# Altium PCB AICat V1.7 双面板 板厚1.6mm.PcbDoc (part 1 of 6)
Units mil, origin at the board's own origin, x right, y up, seen from the top; angles counter-clockwise.
Board outline 2778 x 2104 mil, 2 copper layers (Top Layer, Bottom Layer); 123 components, 84 nets, 332 pads, 255 vias.
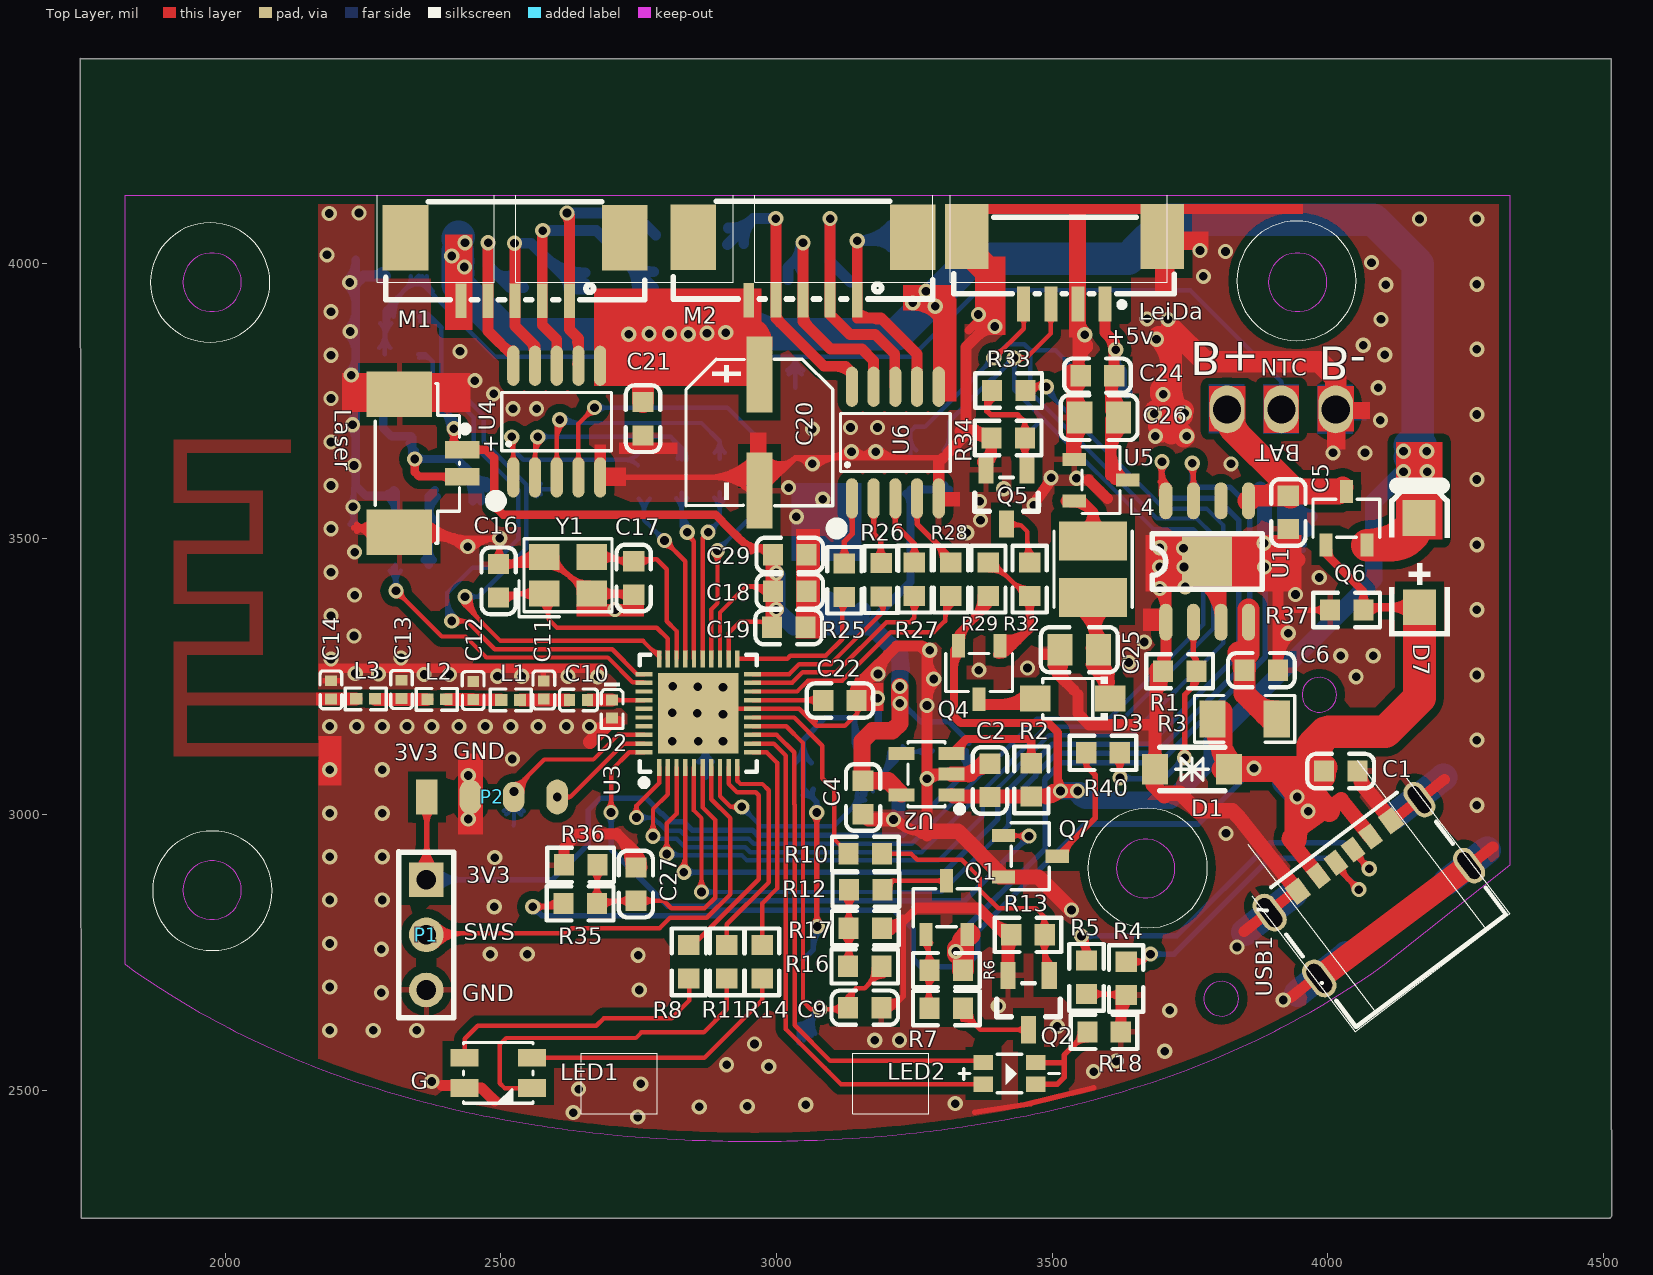
[diagram p0: Top Layer view]
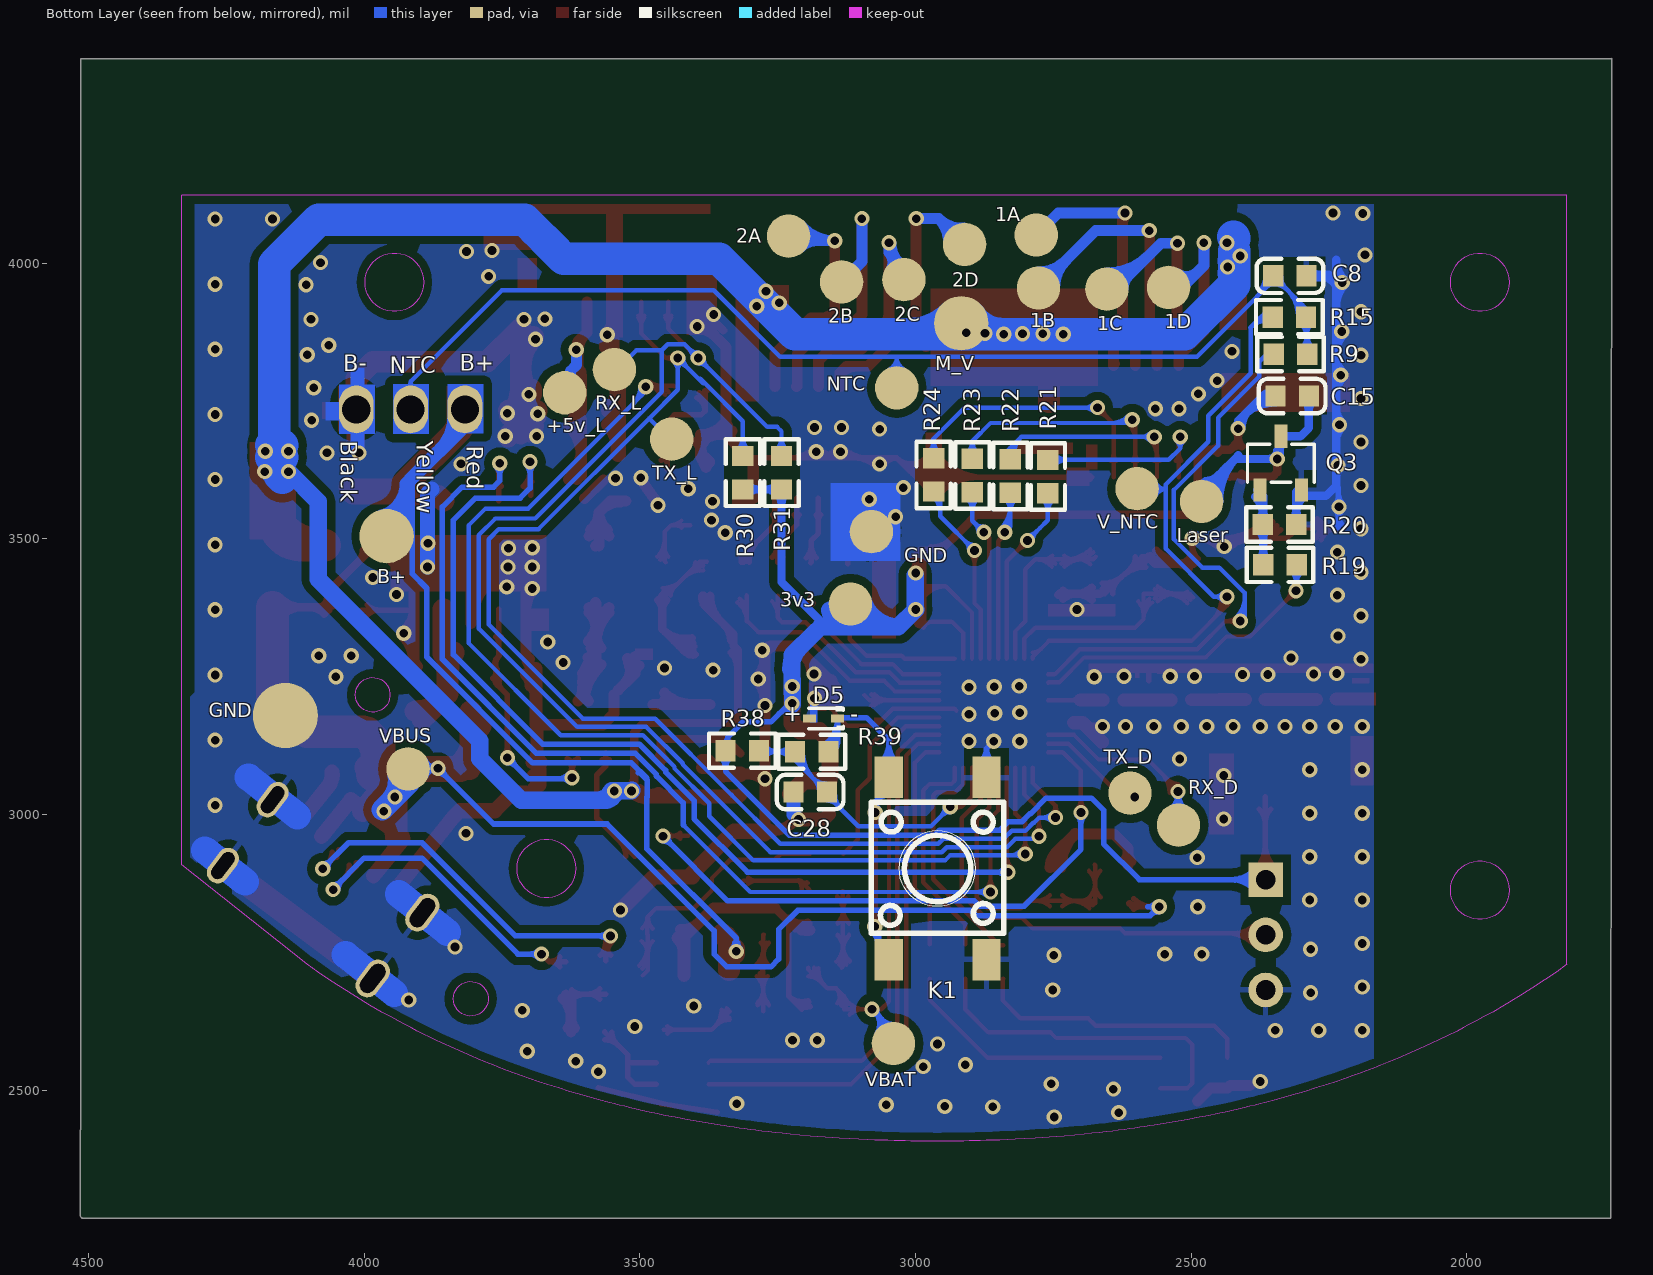
[diagram p1: Bottom Layer view, seen from below]
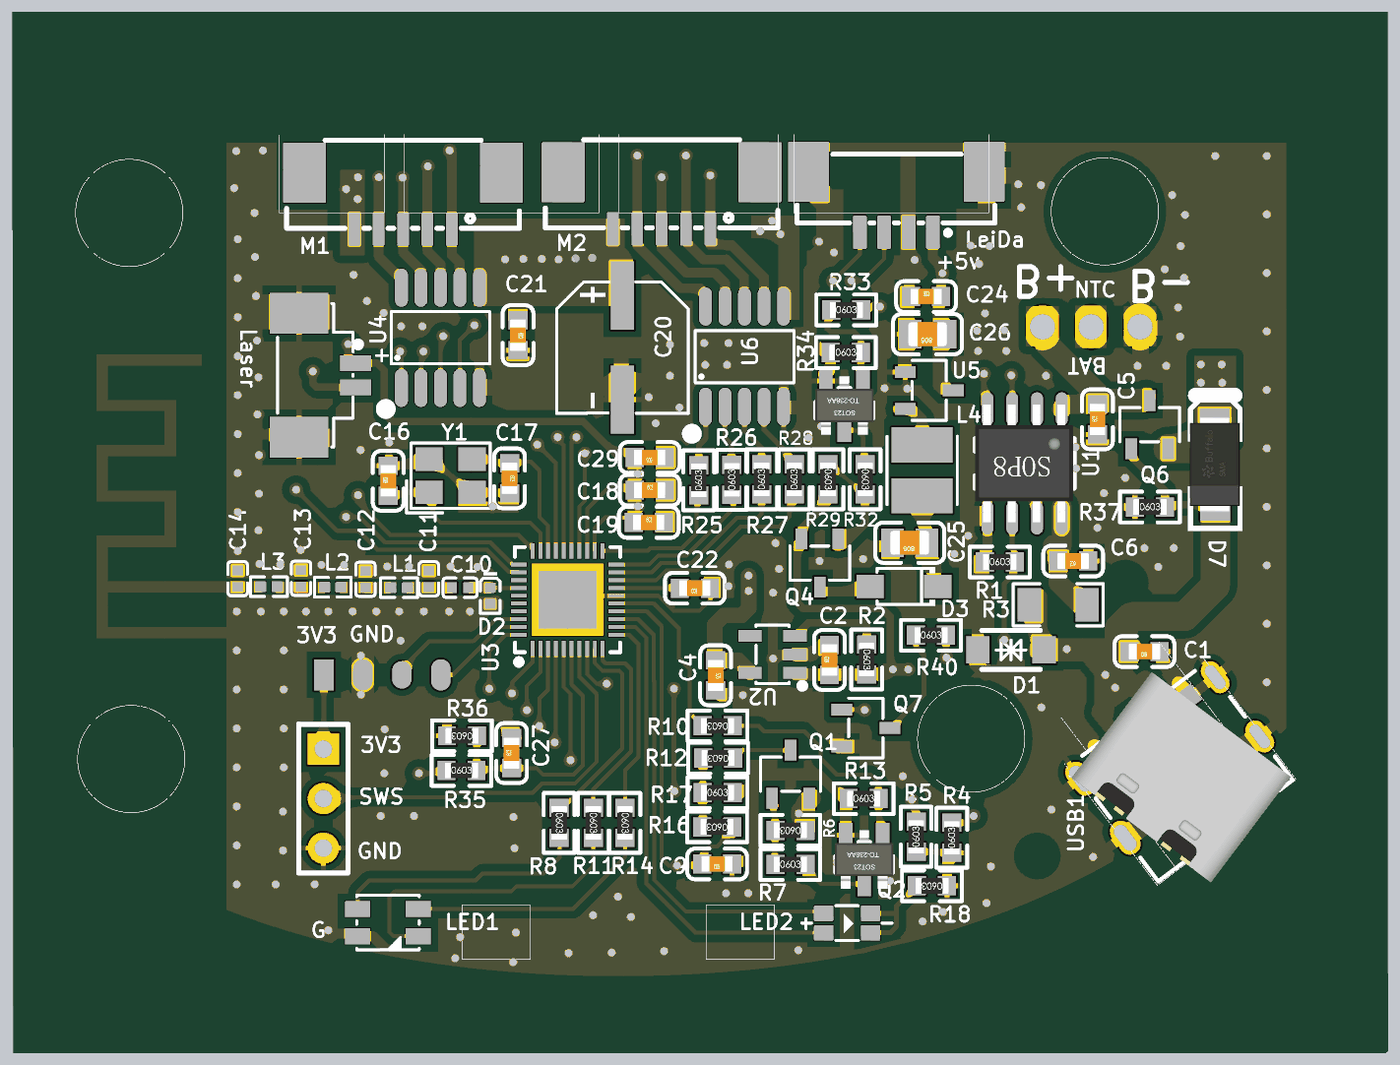
[diagram p7: 3D render of the assembled board from above, using the file's embedded part models]
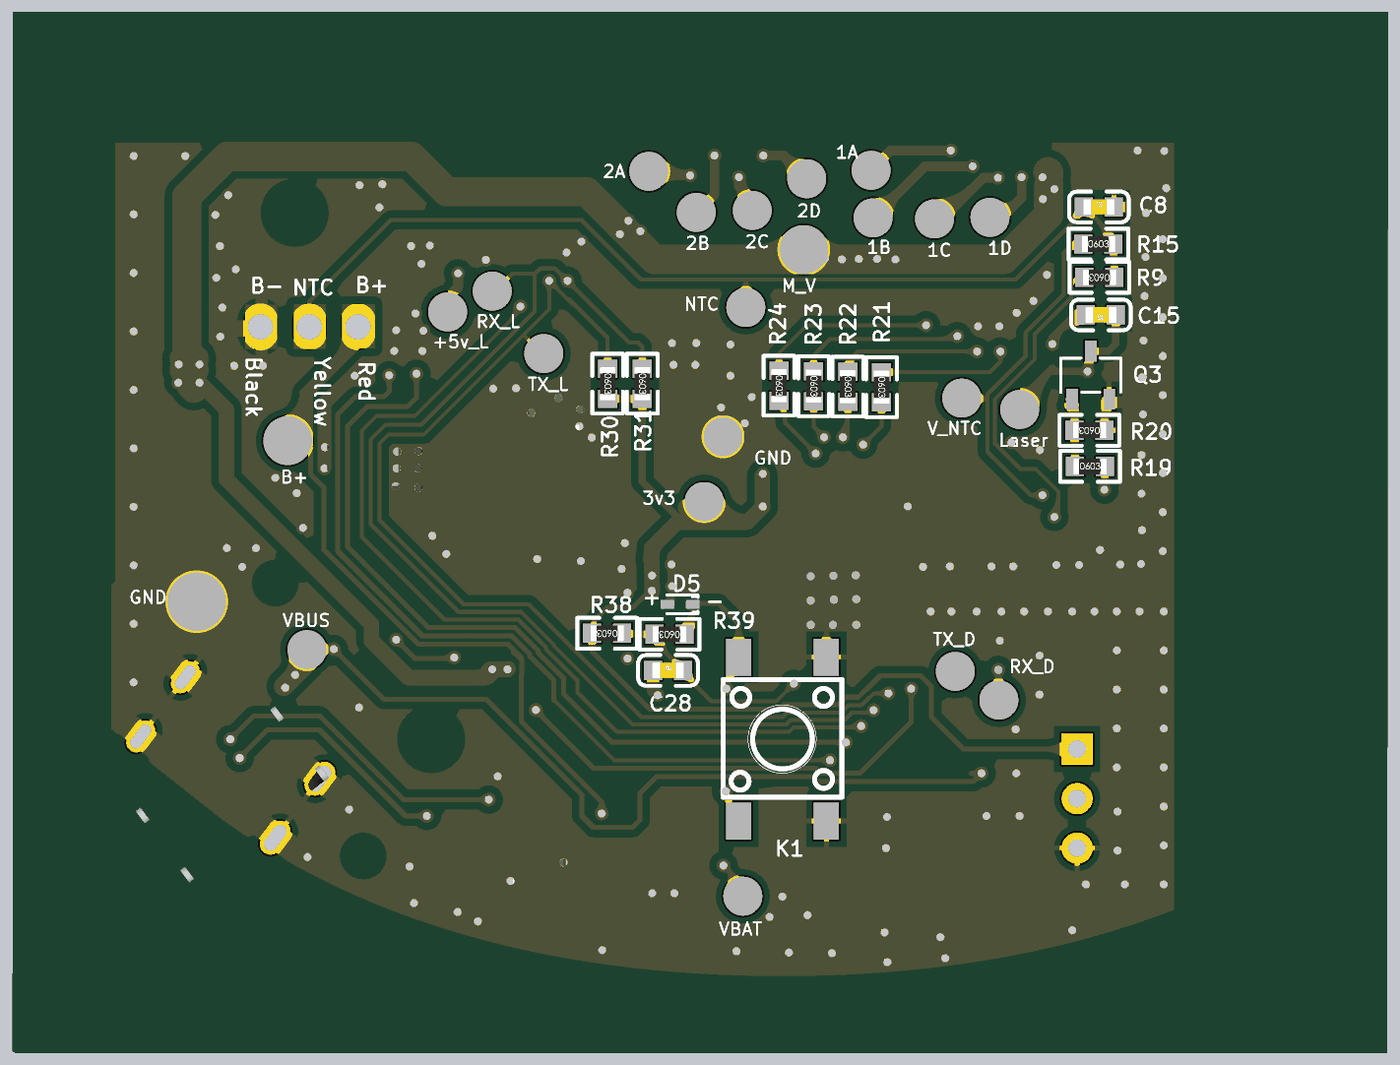
[diagram p8: 3D render of the assembled board from below, using the file's embedded part models]

## Layer stack, top to bottom
Top Layer: signal copper 1.4
Dielectric: dielectric 12.6, FR-4, Dk 4.8
Bottom Layer: signal copper 1.4

## Board outline
1737,4372 1738,4371 4514,4371 4514,2429 4515,2428 4515,2272 4511,2268 1739,2268

## Design rules (kind name [scope] priority, off if disabled: settings)
Clearance [All] p1: gap=5.5
ComponentClearance [All] p1: gap=0 collisioncheckmode=3 verticalgap=0 showdistances=FALSE
HoleToHoleClearance [All] p1: gap=4 allowstackedmicrovias=TRUE
MinimumSolderMaskSliver [All] p1: minsoldermaskwidth=2
PlaneConnect [All] p1: planeconnectstyle=Relief reliefexpansion=10 reliefentries=4 reliefconductorwidth=20 reliefairgap=10
PolygonConnect PolygonConnect_1 [IsVia] p1: connectstyle=Direct reliefconductorwidth=10 reliefentries=4 polygonreliefangle="90 Angle"
PolygonConnect [All] p2: connectstyle=Direct reliefconductorwidth=10 reliefentries=4 polygonreliefangle="90 Angle"
RoutingVias [All] p1: holewidth=28 width=50 viastyle="Through Hole" minholewidth=28 minwidth=50 maxholewidth=28 maxwidth=50
SilkToSilkClearance [All] p1: silktosilkclearance=0
SilkscreenOverComponentPads [All] p1: minsilkscreentomaskgap=0
SolderMaskExpansion [All] p1: expansion=4
TestPointUsage [All] p1: valid=0 allowmultiple=FALSE
Testpoint [All] p1: side=15 testpointundercomponent=TRUE minsize=40 maxsize=100 preferedsize=60 minholesize=0 maxholesize=40 preferedholesize=32 testpointgrid=1 style=1023 order=0-112345678
Width [All] p1: maxlimit=100 minlimit=8 preferedwidth=10 minimp=50.000000 maximp=50.000000 favimp=50.000000
18 further rules are at their usual default settings.

## Classes and differential pairs
component class "ball V1.1": ANT1 BAT C1 C2 C4 C5 C6 C8 C9 C10 C11 C12 C13 C14 C15 C16 C17 C18 C19 C20 C21 C22 C24 C25 C26 C27 C28 C29 D1 D2 D3 D5 D7 K1 L1 L2 L3 L4 Laser LED1 LED2 LeiDa M1 M2 P1 P2 Q1 Q2 Q3 Q4 Q5 Q6 Q7 R1 R2 R3 R4 R5 R6 R7 R8 R9 R10 R11 R12 R13 R14 R15 R16 R17 R18 R19 R20 R21 R22 R23 R24 R25 R26 R27 R28 R29 R30 R31 R32 R33 R34 R35 R36 R37 R38 R39 R40 U1 U2 U3 U4 U5 U6 USB1 Y1

## Components (designator, comment, footprint, x,y, rotation, side; value= is the part's Value field where it differs from the comment)
1A "J-CSD" TP#1 2781,4051 r270 bottom (schematic designator TP3)
1B "J-CSD" TP#1 2777,3955 r270 bottom (schematic designator TP3)
1C "J-CSD" TP#1 2653,3953 r270 bottom (schematic designator TP3)
1D "J-CSD" TP#1 2541,3956 r270 bottom (schematic designator TP3)
2A "J-CSD" TP#1 3230,4049 r270 bottom (schematic designator TP3)
2B "J-CSD" TP#1 3134,3966 r270 bottom (schematic designator TP3)
2C "J-CSD" TP#1 3021,3970 r270 bottom (schematic designator TP3)
2D "J-CSD" TP#1 2911,4034 r270 bottom (schematic designator TP3)
3v3 "J-CSD" TP#1 3118,3382 r270 bottom (schematic designator TP3)
+5v_L "J-CSD" TP#1 3636,3765 r270 bottom (schematic designator TP3)
B+ "J-CSD" TP#2 3959,3505 r270 bottom (schematic designator TP3)
BAT "BX-PH2.0-3PWT" HDR-TH_3P-P2.50_ZX-XH2.54-3PWZ 3943,3898 r180 top (schematic designator BAT1)
C1 "0.1uF" 0603_C 4023,3079 r180 top
C2 "1uf" 0603_C 3387,3062 r270 top
C4 "10uF" 0603_C 3157,3031 r90 top
C5 "10uf" 0603_C 3928,3548 r270 top
C6 "10UF" 0603_c 3879,3262 r180 top
C8 "100nF" 0603_C 2321,3977 r180 bottom
C9 "100nF" 0603_C 3160,2650 r180 top
C10 "220pF" C0402 2641,3208 r180 top
C11 "NC" C0402 2578,3226 r270 top
C12 "NC" C0402 2450,3225 r270 top
C13 "NC" C0402 2320,3227 r270 top
C14 "NC" C0402 2192,3226.2 r270 top
C15 "0.1uf/25v" 0603_C 2317,3759 r0 bottom
C16 "12PF" 0603_c 2496,3424 r270 top
C17 "12PF" 0603_c 2741,3429 r90 top
C18 "1UF" 0603_c 3024,3405 r0 top
C19 "1UF" 0603_c 3022,3340 r0 top
C20 "220uF/10V" "SMD 6.3*5.4 电解" 2968,3687 r270 top
C21 "100nf" 0603_C 2758,3718 r90 top
C22 "1UF" 0603_c 3115,3207 r180 top
C24 "0.1uF" 0603_C 3582,3796 r0 top
C25 "22uf-16v" 0805_c 3549,3299 r180 top
C26 "22uf-16v" 0805_c 3585,3720 r180 top
C27 "0.1uF" 0603_C 2745,2874 r270 top
C28 "100nF" 0603_c 3191,3041 r180 bottom
C29 "10uF 10v" 0603_C 3024,3471 r180 top
D1 "SMF5.0CA_C726939" "SOD-123 双向" 3760,3080 r0 top
D2 "SE6V3LHN102T 6.3v单向" 0402-D 2707,3189 r270 top
D3 "DSK24" SOD-123FL 3531,3204 r180 top
D5 "esd5z5.0t1g-ms" SOD-523_L1.2-W0.8-LS1.6-RD 3166.7,3174.4 r0 bottom
D7 "SS54" SMA 4169,3433 r270 top
GND "J-CSD" TP#3 4142.7,3179.8 r270 bottom (schematic designator TP3)
GND "J-CSD" TP#1 3080,3513 r270 bottom (schematic designator TP3)
K1 "KEY" KEY_SMD_4P 2960,2904 r270 bottom locked
L1 "0R" R0402 2518,3208 r180 top
L2 "0R" R0402 2384,3209 r180 top
L3 "0R" R0402 2255,3210 r180 top
L4 "47uH" IND-SMD_L3.5-W3.0_CD31 3574,3445 r90 top
Laser "JiGuang" CONN-SMD_2P-P1.25-LT 2373,3637 r270 top (schematic designator CN1)
Laser "J-CSD" TP#1 2481,3568 r270 bottom (schematic designator TP3)
LED1 "XL-A3528RGBC-BM" LED-ARRAY-SMD_4P-L3.2-W2.8-LS3.5-BL_XL-A3528RGBC-BM 2495.46,2531.68 r0 top
LED2 "*" LED-SMD_4P-L3.2-W1.6-TL_XL-3216SURUGC 3422.54,2530.68 r0 top
LeiDa "HC-1.25-4PLT" CONN-SMD_4P-P1.25_LT 3522,3987 r180 top (schematic designator CN2)
M1 "MOTORA" CONN-SMD_1.25-5PLT 2526,3989 r180 top (schematic designator J1)
M2 "MOTORB" CONN-SMD_1.25-5PLT 3048,3990 r180 top (schematic designator J2)
M_V "J-CSD" TP#2 2917,3891 r270 bottom (schematic designator TP3)
NTC "J-CSD" TP#1 3034,3774 r270 bottom (schematic designator TP3)
P1 "DEBUG" SIP4-2.54#1 2365,2982 r270 top (schematic designator P2)
P2 "UART" SIP4-2.54#2 2366,3032 r0 top
Q1 "SI2301 P" SOT-23 3317,2811 r270 top
Q2 "S8050" SOT-23(SOT-23-3) 3457,2659 r90 top
Q3 "AO3400" SOT-23 2329,3617 r270 bottom
Q4 "SI2301 P" SOT-23 3359,3278 r90 top
Q5 "S8050" SOT-23(SOT-23-3) 3417,3576 r90 top
Q6 "3401" SOT-23 4042,3517 r270 top
Q7 "2N7002" SOT-23 3440,2916 r180 top
R1 "3.9K" 0603_R 3731,3260 r0 top
R2 "10k" 0603_R 3462,3063 r90 top
R3 "R250" 1206_R 3843,3172 r180 top
R4 "5.1K" 0603_R 3634,2703 r270 top
R5 "5.1K" 0603_R 3562,2705 r270 top
R6 "560K" 0603_R 3308,2718 r180 top
R7 "1K" 0603_R 3308,2649 r0 top
R8 "1k" 0603_R 2841,2733 r90 top
R9 "10k" 0603_R 2320,3835 r0 bottom
R10 "1K" 0603_r 3161,2929 r180 top
R11 "1k" 0603_R 2910,2733 r90 top
R12 "560K" 0603_R 3162,2864 r180 top
R13 "10K" 0603_r 3456,2782 r0 top
R14 "1k" 0603_R 2974,2733 r90 top
R15 "100R" 0603_R 2322,3902 r180 bottom
R16 "1K" 0603_R 3160,2725 r180 top
R17 "100K" 0603_R 3161,2794 r0 top
R18 "1K" 0603_R 3594,2606 r180 top
R19 "330R" 0603_R 2339,3453 r180 bottom
R20 "10K" 0603_R 2340,3526 r0 bottom
R21 "330R" 0603_R 2760,3613 r270 bottom
R22 "330R" 0603_R 2828,3614 r270 bottom
R23 "330R" 0603_R 2897,3615 r270 bottom
R24 "330R" 0603_R 2967,3616 r270 bottom
R25 "330R" 0603_R 3123,3425 r270 top
R26 "330R" 0603_R 3190,3426 r270 top
R27 "330R" 0603_R 3250,3427 r270 top
R28 "330R" 0603_R 3316,3427 r270 top
R29 "560K" 0603_R 3384,3427 r90 top
R30 "1M" 0603_R 3313,3620 r270 bottom
R31 "1M" 0603_R 3243,3620 r270 bottom
R32 "1K" 0603_R 3459,3427 r90 top
R33 "1K" 0603_r 3421,3769 r0 top
R34 "10K" 0603_r 3420,3683 r0 top
R35 "10K" 0603_R 2644,2839 r0 top
R36 "20K" 0603_R 2645,2909 r180 top
R37 "10K" 0603_R 4034,3371 r0 top
R38 "10k" 0603_R 3314,3116 r0 bottom
R39 "100R" 0603_r 3188,3114 r0 bottom
R40 "2k" 0603_R 3592,3112 r0 top
RX_D "J-CSD" TP#1 2523,2981 r270 bottom (schematic designator TP3)
RX_L "J-CSD" TP#1 3546,3807 r270 bottom (schematic designator TP3)
TX_D "J-CSD" TP#1 2611,3039 r270 bottom (schematic designator TP3)
TX_L "J-CSD" TP#1 3442,3681 r270 bottom (schematic designator TP3)
U1 "TP4056X" SOP8-9 3781,3459 r0 top
U2 "SSP7615" SOT-23-5 3265,3056 r180 top
U3 "TLSR8208C" QFN-40_L5.0-W5.0-P0.40-BL-EP3.7 2860,3181 r0 top
U4 "ULN2802" ESSOP-10 2607,3705 r0 top
U5 "HE9116A50NR" SOT-23 3568,3598 r180 top
U6 "ULN2802" ESSOP-10 3221,3667 r0 top
USB1 "TYPE-C 6P" TPYE-C-6 4075,2865 r127 top
V_NTC "J-CSD" TP#1 2598,3591 r270 bottom (schematic designator TP3)
VBAT "J-CSD" TP#1 3040,2585 r270 bottom (schematic designator TP3)
VBUS "J-CSD" TP#1 3920,3083 r270 bottom (schematic designator TP3)
Y1 "24MHz +-20PPM" CRYSTAL-SMD_4P-L3.2-W2.5 2633,3432 r0 top

## Footprints (in the part's own frame and the unit in brackets; to place one, negate y for a bottom-side part, rotate by r counter-clockwise, add the part's x,y. Pads: shape width x height; smd on the part's side, far side on the other; paste and mask are expansions set on the pad)
0402-D [mil]
  rect 19.89x21.68 smd paste-3937.01 mask+2: 1(-19.05,-5.15) 2(13.75,-5.15)
  silkscreen extent -50,-25 33,15
0603_C [mm]
  rect 0.93x0.98 smd: 1(-0.77,0) 2(0.77,0)
  silkscreen extent -1.54,-0.79 1.54,0.79, body extent -0.8,-0.4 0.8,0.4, height 0.3
0603_c [mm]
  rect 0.93x0.98 smd: 1(-0.77,0) 2(0.77,0)
  silkscreen extent -1.54,-0.79 1.54,0.79, body extent -0.8,-0.4 0.8,0.4, height 0.3
0603_R [mm]
  rect 0.93x0.98 smd: 1(-0.77,0) 2(0.77,0)
  silkscreen extent -1.53,-0.79 1.54,0.79, body extent -0.85,-0.4 0.85,0.4, height 0.56
0603_r [mm]
  rect 0.93x0.98 smd: 1(-0.77,0) 2(0.77,0)
  silkscreen extent -1.53,-0.79 1.54,0.79, body extent -0.85,-0.4 0.85,0.4, height 0.56
0805_c [mm]
  rect 1.16x1.47 smd: 1(-0.89,0) 2(0.89,0)
  silkscreen extent -1.77,-1.04 1.77,1.04, body extent -1,-0.62 1,0.63, height 0.77
1206_R [mil]
  rect 47.54x66.97 smd: 1(-64.23,-1.52) 2(52.21,-1.52)
  silkscreen extent -97,-44 85,41
C0402 [mm]
  rect 0.5x0.54 smd: 1(-0.42,0) 2(0.42,0)
  silkscreen extent -0.87,-0.5 0.87,0.5
CONN-SMD_1.25-5PLT [mm]
  rect 0.5x1.6 smd paste+0.051: 1(-2.5,1.45) 2(-1.25,1.45) 3(0,1.45) 4(1.25,1.45) 5(2.5,1.45)
  rect 2.1x3 smd paste+0.051: 6(-5.05,-1.45) 7(5.05,-1.45)
  silkscreen extent -5.97,-3.12 5.97,1.4
CONN-SMD_2P-P1.25-LT [mm]
  rect 0.8x1.6 smd paste+0 mask+0.05: 1(-0.625,1.45) 2(0.625,1.45)
  rect 2.1x3 smd paste+0 mask+0.05: 3(-3.175,-1.45) 4(3.175,-1.45)
  silkscreen extent -3.68,-2.55 3.68,1.73
CONN-SMD_4P-P1.25_LT [mm]
  rect 0.6x1.6 smd paste+0.051: 1(-1.875,1.55) 2(-0.625,1.55) 3(0.625,1.55) 4(1.875,1.55)
  rect 2x3 smd paste+0.051: 5(-4.5,-1.55) 6(4.5,-1.55)
  silkscreen extent -5.06,-2.45 5.09,1.7
CRYSTAL-SMD_4P-L3.2-W2.5 [mm]
  rect 1.4x1.2 smd: 1(-1.383,-0.797) 2(0.817,-0.797) 3(0.817,0.903) 4(-1.383,0.903)
  silkscreen extent -2.54,-1.85 1.75,1.73
ESSOP-10 [mm]
  oval 0.56x1.855 smd paste+0.051: 1(-2.141,-2.375) 2(-1.141,-2.375) 3(-0.141,-2.375) 4(0.859,-2.375) 5(1.859,-2.375) 6(1.859,2.765) 7(0.859,2.765) 8(-0.141,2.765) 9(-1.141,2.765) 10(-2.141,2.765)
  silkscreen extent -2.67,-1.14 2.39,1.53
HDR-TH_3P-P2.50_ZX-XH2.54-3PWZ [mm]
  oval 1.6x2.2 hole 1.3: 1(-1.801,4.145) 2(0.699,4.145) 3(3.199,4.145)
IND-SMD_L3.5-W3.0_CD31 [mm]
  rect 1.8x3.12 smd: 1(-1.303,0) 2(1.303,0)
  silkscreen extent -1.75,-1.8 1.75,1.8
KEY_SMD_4P [mm]
  rect 1.9x1.3 smd: 1(-4.155,2.252) 2(4.244,2.252) 3(-4.155,-2.247) 4(4.244,-2.247)
  silkscreen extent -3.01,-3.05 3.02,3.05
LED-ARRAY-SMD_4P-L3.2-W2.8-LS3.5-BL_XL-A3528RGBC-BM [mm]
  rect 1.3x0.82 smd paste+0 mask+0.05: 1(-1.55,-0.7) 2(-1.55,0.7) 3(1.55,-0.7) 4(1.55,0.7)
  silkscreen extent -1.6,-1.4 1.6,1.4
LED-SMD_4P-L3.2-W1.6-TL_XL-3216SURUGC [mm]
  rect 0.9x0.7 smd paste+0.051: 1(-1.2,0.5) 2(1.2,0.5) 3(-1.2,-0.5) 4(1.2,-0.5)
  silkscreen extent -2.33,-0.89 2.3,0.89
QFN-40_L5.0-W5.0-P0.40-BL-EP3.7 [mm]
  rect 0.2x0.8 smd paste-100 mask+0.05: 1(-1.847,-2.425) 2(-1.447,-2.425) 3(-1.047,-2.425) 4(-0.647,-2.425) 5(-0.247,-2.425) 6(0.153,-2.425) 7(0.553,-2.425) 8(0.953,-2.425) 9(1.353,-2.425) 10(1.753,-2.425) 21(1.753,2.573) 22(1.353,2.573) 23(0.953,2.573) 24(0.553,2.573) 25(0.153,2.573) 26(-0.247,2.573) 27(-0.647,2.573) 28(-1.047,2.573) 29(-1.447,2.573) 30(-1.847,2.573)
  rect 0.8x0.2 smd paste-100 mask+0.05: 11(2.452,-1.726) 12(2.452,-1.326) 13(2.452,-0.926) 14(2.452,-0.526) 15(2.452,-0.126) 16(2.452,0.274) 17(2.452,0.674) 18(2.452,1.074) 19(2.452,1.474) 20(2.452,1.874) 31(-2.546,1.874) 32(-2.546,1.474) 33(-2.546,1.074) 34(-2.546,0.674) 35(-2.546,0.274) 36(-2.546,-0.126) 37(-2.546,-0.526) 38(-2.546,-0.926) 39(-2.546,-1.326) 40(-2.546,-1.726)
  rect 3.7x3.7 smd paste-100 mask+0.05: 41(-0.047,0.074)
  silkscreen extent -2.75,-3.28 2.65,2.77
R0402 [mm]
  rect 0.566x0.54 smd paste-100 mask+0.051: 1(-0.433,0) 2(0.433,0)
  silkscreen extent -0.94,-0.5 0.94,0.5
SIP4-2.54#1 [mm]
  rect 1.6x1.6 hole 0.9: 2(2.54,0)
  round 1.6 hole 0.9: 3(5.08,0) 4(7.62,0)
  silkscreen extent 1.24,-1.27 8.89,1.27
SIP4-2.54#2 [mm]
  rect 1x1.6 smd: 1(0,0)
  oval 1x1.6 smd: 2(2,0) 4(6,0)
  oval 1x1.4 smd: 3(4,0)
SMA [mm]
  rect 1.65x1.53 smd: 1(1.449,-0.076) 2(-2.665,-0.102)
  silkscreen extent -4.16,-1.47 2.8,1.32, body extent -3.06,-1.39 1.84,1.18, height 2.39
"SMD 6.3*5.4 电解" [mm]
  rect 3.5x1.2 smd: 1(-2.822,0.023) 2(2.518,0.023)
  silkscreen extent -3.53,-3.35 3.22,3.4
"SOD-123 双向" [mm]
  rect 1.2x1.4 smd: 1(-1.864,0.06) 2(1.536,0.06)
  silkscreen extent -1.66,-0.94 1.34,1.06
SOD-123FL [mm]
  rect 1.4x1.2 smd: 1(1.579,-0.166) 2(-1.891,-0.166)
  silkscreen extent -1.76,-1.17 1.22,0.84
SOD-523_L1.2-W0.8-LS1.6-RD [mm]
  rect 0.6x0.36 smd paste+0.051 mask+0: 1(-0.65,0) 2(0.65,0)
  silkscreen extent -0.91,-0.55 0.68,0.55
SOP8-9 [mil]
  oval 24x66.93 smd: 1(-75,-110) 2(-25,-110) 3(25,-110) 4(75,-110) 5(75,110) 6(25,110) 7(-25,110) 8(-75,110)
  rect 90.55x90.55 smd: 9(0,0)
  silkscreen extent -100,-50 100,50, body extent -100,-119 98,119, height 63
SOT-23 [mm]
  rect 1.07x0.6 smd: 1(0.719,-1.166) 2(0.719,0.734) 3(-1.751,-0.216)
  silkscreen extent -1.39,-1.75 0.36,1.32
SOT-23(SOT-23-3) [mm]
  rect 1.25x0.7 smd: 1(1.25,-0.95) 2(1.25,0.95) 3(-1.25,0)
  silkscreen extent -0.65,-1.46 0.9,1.46, body extent -1.5,-1.5 1.5,1.5, height 1.3
SOT-23-5 [mm]
  rect 1.2x0.6 smd paste+0 mask+0.05: 1(-1.325,0.51) 2(-1.325,-0.44) 3(-1.325,-1.39) 4(0.975,-1.39) 5(0.975,0.51)
  silkscreen extent -1.85,-1.94 0.67,1.32
TP#1 [mm]
  round 2 smd: 1(0,0)
TP#2 [mm]
  round 2.5 smd: 1(0,0)
TP#3 [mm]
  round 3 smd: 1(0,0)
TPYE-C-6 [mm]
  oval 1.9x1.1 hole 0.7 slot 1.5 at 0 deg: 7(-1.9,4.32) 7(1.9,4.32)
  oval 1.8x1 hole 0.6 slot 1.4 at 0 deg: 7(-1.9,-4.32) 7(1.9,-4.32)
  rect 1x0.7 smd: A5(1.9,0.5) A9(1.9,-1.5) B5(1.9,-0.5) B9(1.9,1.5)
  rect 1x0.8 smd: A12(1.9,-2.7) B12(1.9,2.7)
  silkscreen extent -4.7,-4.32 2.79,4.65, body extent -4.55,-4.45 2.25,4.49, height 3.41

## Part data
C1 C4 C5 C15 C24 C27 C29: library part Cap, "Capacitor"
C2 C21 C25 C26: library part Cap1, "无极电容"
C6 C8 C9 C18 C19 C22: library part CAP
C10 C11 C12 C13 C14 C16 C17: library part CAP, "Capacitor"
C20: library part RVT1A221M0605_C72494
C28: library part CAP_0603
D2: library part TPNSR05F20NXT5G
D3 D7: library part "Diode 1N4148", "High Conductance Fast Diode"
D5: library part LESD5Z5.0CT1G
K1: library part TS-1002S-05026C
L1 L2 L3: library part INDUCTOR
L4: library part "CD31-470M 47UH"
Laser: library part HC-1.25-2PLT
LED2: library part TJ-S2012SW8TCGLC2R2G-A5
M1 M2: library part HC-1.25-5PLT
P1 P2: library part "Header 4", "Header, 4-Pin"
Q1 Q3 Q4: library part JMTL3400A
Q2 Q5: library part NPN_sot23, "NPN三极管"
Q6: library part CJ3401
Q7: library part AO3400_SOT23
R1 R3 R4 R5 R6 R7 R8 R11 R12 R14 R16 R17 R18 R20 R29 R30 R31 R32 R35 R36 R38 R40: library part RES
R2 R9 R10 R13 R15 R19 R21 R22 R23 R24 R25 R26 R27 R28 R33 R34 R37: library part Res2, "Resistor"
R39: library part Res_0603
U1: library part TP4056, "TP4056"
U2: library part SSP7615-33M5R
U4 U6: library part ULN2802_C2828555
USB1: library part "TYPE-C 6P LTH6.5"
Y1: library part TAXM13.56M4RLBCCT2T

## Via types
v1: diameter 27.56, hole 15.75, Top Layer to Bottom Layer, tented both sides, 255 vias

## Nets (pads, with @x,y where several pads share a name; then routed paths per layer and width w, separated by ;. In a path a pad name is that pad's centre, name@x,y a point inside that pad or via, vN(x,y) a via of type N, cw(c..) or ccw(c..) an arc to the next point about the centre after c; other vN are vias at no path point)
3V3: 3v3.1 C4.2 C15.2 C18.1 C19.1 C29.2 Laser.1@2430.09,3661.61 P1.2 P2.1 R30.2 R31.2 R38.2 U2.5 U3.22 U3.23 | length 9444.6
  Top Layer w8: U3.23@2897.52,3282.31 2897.52,3366.52 2945,3414 ; U3.22@2913.27,3282.31 2913.27,3322 2913.27,3329.27 2934,3350 2968.68,3350 ; 2968.24,3350 cw(c2968.24,3330.71) C19.1@2985.91,3338.45 ; C18.1@2990.68,3414 2975,3414 ; 2945,3414 cw(c2945,3364.06) 2982.84,3396.65 ccw(c2945,3364.06) 2945,3414 ; 2945,3414 2975,3414 ; 2967,3414 cw(c2967,3401.2) C18.1@2979.6,3403.46 ; 2967,3414 cw(c2967,3401.2) C18.1@2979.6,3403.46 ; 2967,3414 cw(c2967,3401.2) C18.1@2979.6,3403.46 ; 2967,3414 2975,3414 ; C18.1@2976.56,3414 cw(c2976.56,3402.91) C18.1@2987.48,3404.87 ; C18.1@2976.56,3414 cw(c2976.56,3402.91) C18.1@2987.48,3404.87 ; C18.1@2976.56,3414 cw(c2976.56,3402.91) C18.1@2987.48,3404.87 ; 2962.45,3414 cw(c2962.45,3379.09) 2988.9,3401.87 ccw(c2962.45,3379.09) 2962.45,3414
  Top Layer w10: P1.2@2365,2882 2366,2883 P2.1@2366,3032 ; P1.2@2346.26,2900.74 ccw(c2298.62,2948.38) 2366,2948.38 ; P1.2@2346.26,2900.74 ccw(c2298.62,2948.38) 2366,2948.38 ; P1.2@2346.26,2900.74 ccw(c2298.62,2948.38) 2366,2948.38 ; P1.2@2346.26,2900.74 ccw(c2298.62,2948.38) 2366,2948.38 ; P1.2@2346.26,2900.74 ccw(c2298.62,2948.38) 2366,2948.38 ; P1.2@2353.34,2893.66 ccw(c2322.76,2924.24) 2366,2924.24 ; P1.2@2353.34,2893.66 ccw(c2322.76,2924.24) 2366,2924.24 ; P1.2@2353.34,2893.66 ccw(c2322.76,2924.24) 2366,2924.24 ; P1.2@2353.34,2893.66 ccw(c2322.76,2924.24) 2366,2924.24 ; P1.2@2353.34,2893.66 ccw(c2322.76,2924.24) 2366,2924.24 ; P2.1@2355.62,3009.81 cw(c2330.55,2984.74) 2366,2984.74 ; P2.1@2355.62,3009.81 cw(c2330.55,2984.74) 2366,2984.74 ; P2.1@2355.62,3009.81 cw(c2330.55,2984.74) 2366,2984.74 ; P2.1@2355.62,3009.81 cw(c2330.55,2984.74) 2366,2984.74 ; P2.1@2355.62,3009.81 cw(c2330.55,2984.74) 2366,2984.74 ; 2366,2919.41 ccw(c2402.41,2919.41) P1.2@2376.66,2893.66 ; 2366,2919.41 ccw(c2402.41,2919.41) P1.2@2376.66,2893.66 ; 2366,2919.41 ccw(c2402.41,2919.41) P1.2@2376.66,2893.66 ; 2366,2919.41 ccw(c2402.41,2919.41) P1.2@2376.66,2893.66 ; 2366,2919.41 ccw(c2402.41,2919.41) P1.2@2376.66,2893.66 ; 2366,2943.55 ccw(c2426.55,2943.55) P1.2@2383.74,2900.74 ; 2366,2943.55 ccw(c2426.55,2943.55) P1.2@2383.74,2900.74 ; 2366,2943.55 ccw(c2426.55,2943.55) P1.2@2383.74,2900.74 ; 2366,2943.55 ccw(c2426.55,2943.55) P1.2@2383.74,2900.74 ; 2366,2943.55 ccw(c2426.55,2943.55) P1.2@2383.74,2900.74 ; 2366,2984.74 cw(c2401.45,2984.74) P2.1@2376.38,3009.81 ; 2366,2984.74 cw(c2401.45,2984.74) P2.1@2376.38,3009.81 ; 2366,2984.74 cw(c2401.45,2984.74) P2.1@2376.38,3009.81 ; 2366,2984.74 cw(c2401.45,2984.74) P2.1@2376.38,3009.81 ; 2366,2984.74 cw(c2401.45,2984.74) P2.1@2376.38,3009.81
  Top Layer w15: v1(2415,3700) 2415,3676.69 Laser.1@2430.09,3661.61 2473.39,3661.61 2488,3647 2488,3560 2504,3544 2889.24,3544 2915.12,3518.12 ; 2931,3502.24 2915.12,3518.12 ; 2935.42,3497.81 ccw(c2971.69,3534.07) 2971.69,3482.79 ; 2954.24,3479 2915.12,3518.12 ; C29.2@2976.24,3479 C29.2@2991.69,3479 ; C19.1@2990.68,3350 C19.1@2991.69,3351 ; Laser.1@2408.5,3667.44 ccw(c2392.82,3683.12) 2415,3683.12 ; Laser.1@2408.5,3667.44 ccw(c2392.82,3683.12) 2415,3683.12 ; Laser.1@2408.5,3667.44 ccw(c2392.82,3683.12) 2415,3683.12 ; Laser.1@2408.5,3667.44 ccw(c2392.82,3683.12) 2415,3683.12 ; Laser.1@2408.5,3667.44 ccw(c2392.82,3683.12) 2415,3683.12 ; v1@2410.56,3695.56 cw(c2399.84,3684.84) 2415,3684.84 ; v1@2410.56,3695.56 cw(c2399.84,3684.84) 2415,3684.84 ; v1@2410.56,3695.56 cw(c2399.84,3684.84) 2415,3684.84 ; v1@2410.56,3695.56 cw(c2399.84,3684.84) 2415,3684.84 ; v1@2410.56,3695.56 cw(c2399.84,3684.84) 2415,3684.84 ; 2415,3679.92 ccw(c2432.65,3679.92) Laser.1@2420.17,3667.44 ; 2415,3679.92 ccw(c2432.65,3679.92) Laser.1@2420.17,3667.44 ; 2415,3679.92 ccw(c2432.65,3679.92) Laser.1@2420.17,3667.44 ; 2415,3679.92 ccw(c2432.65,3679.92) Laser.1@2420.17,3667.44 ; 2415,3679.92 ccw(c2432.65,3679.92) Laser.1@2420.17,3667.44 ; 2415,3684.84 cw(c2430.16,3684.84) v1@2419.44,3695.56 ; 2415,3684.84 cw(c2430.16,3684.84) v1@2419.44,3695.56 ; 2415,3684.84 cw(c2430.16,3684.84) v1@2419.44,3695.56 ; 2415,3684.84 cw(c2430.16,3684.84) v1@2419.44,3695.56 ; 2415,3684.84 cw(c2430.16,3684.84) v1@2419.44,3695.56 ; Laser.1@2451.67,3655.77 cw(c2465.75,3641.69) 2465.75,3661.61 ; Laser.1@2451.67,3655.77 cw(c2465.75,3641.69) 2465.75,3661.61 ; Laser.1@2451.67,3655.77 cw(c2465.75,3641.69) 2465.75,3661.61 ; Laser.1@2451.67,3655.77 cw(c2465.75,3641.69) 2465.75,3661.61 ; Laser.1@2451.67,3655.77 cw(c2465.75,3641.69) 2465.75,3661.61 ; Laser.1@2451.67,3667.44 ccw(c2465.75,3681.52) 2465.75,3661.61 ; Laser.1@2451.67,3667.44 ccw(c2465.75,3681.52) 2465.75,3661.61 ; Laser.1@2451.67,3667.44 ccw(c2465.75,3681.52) 2465.75,3661.61 ; Laser.1@2451.67,3667.44 ccw(c2465.75,3681.52) 2465.75,3661.61 ; Laser.1@2451.67,3667.44 ccw(c2465.75,3681.52) 2465.75,3661.61
  Top Layer w23.62: C19.1@2991.69,3351 C29.2@2991.69,3471 ; 2991.69,3383.51 cw(c3014.19,3383.51) C18.1@2998.28,3399.42 ; 2991.69,3383.51 cw(c3014.19,3383.51) C18.1@2998.28,3399.42 ; 2991.69,3383.51 cw(c3014.19,3383.51) C18.1@2998.28,3399.42 ; 2991.69,3426.49 ccw(c3014.19,3426.49) C18.1@2998.28,3410.58 ; 2991.69,3426.49 ccw(c3014.19,3426.49) C18.1@2998.28,3410.58 ; 2991.69,3426.49 ccw(c3014.19,3426.49) C18.1@2998.28,3410.58 ; 2991.69,3449.5 cw(c3014.2,3449.5) C29.2@2998.28,3465.42 ; 2991.69,3449.5 cw(c3014.2,3449.5) C29.2@2998.28,3465.42 ; 2991.69,3449.5 cw(c3014.2,3449.5) C29.2@2998.28,3465.42 ; C19.1@2991.69,3349.53 cw(c3020.02,3349.53) 3001.01,3370.54 ccw(c3020.02,3349.53) C19.1@2991.69,3349.53 ; C18.1@2991.69,3396.07 ccw(c3023.75,3396.07) 3001.08,3373.39 cw(c3023.75,3396.07) C18.1@2991.69,3396.07 ; C18.1@2991.69,3413.93 cw(c3023.75,3413.93) 3001.08,3436.61 ccw(c3023.75,3413.93) C18.1@2991.69,3413.93 ; C29.2@2991.69,3462.07 ccw(c3023.75,3462.07) 3001.08,3439.39 cw(c3023.75,3462.07) C29.2@2991.69,3462.07
  Top Layer w31.5: C4.2@3155,3070 3155,3133 3174,3152 ; C4.2@3157,3061.31 3202.69,3061.31 U2.5@3226.62,3037.38 ; 3189,3152 3174,3152 ; v1@3223.69,3232 v1(3223.69,3201.69) 3224,3201.37 3224,3166 3210,3152 3174,3152
  Bottom Layer w10: P1.2@2365,2882 2594,2882 2659,2947 2659,3008 2681,3030 2763,3030 2791.59,3001.41 2792.89,3001.41 2807.3,2987 2832,2987 2847,2972 2956.37,2972 2965.37,2963 3229,2963 3344.32,3078.32 R38.2@3344.32,3116 ; v1@3217.79,3225.79 cw(c3202.8,3210.8) 3224,3210.8 cw(c3245.2,3210.8) v1@3230.21,3225.79 ; v1@3224,3206 3262,3168 3285,3168 ; 3297,3168 3285,3168 ; 3315,3166 3320.89,3160.11 ; R38.2@3334.91,3105.61 cw(c3312.19,3082.89) 3344.32,3082.89 cw(c3376.44,3082.89) R38.2@3353.73,3105.61 ; P1.2@2376.66,2870.34 cw(c2404.82,2842.18) 2404.82,2882 ; P1.2@2376.66,2870.34 cw(c2404.82,2842.18) 2404.82,2882 ; P1.2@2376.66,2870.34 cw(c2404.82,2842.18) 2404.82,2882 ; P1.2@2376.66,2870.34 cw(c2404.82,2842.18) 2404.82,2882 ; P1.2@2376.66,2870.34 cw(c2404.82,2842.18) 2404.82,2882 ; P1.2@2376.66,2893.66 ccw(c2404.82,2921.82) 2404.82,2882 ; P1.2@2376.66,2893.66 ccw(c2404.82,2921.82) 2404.82,2882 ; P1.2@2376.66,2893.66 ccw(c2404.82,2921.82) 2404.82,2882 ; P1.2@2376.66,2893.66 ccw(c2404.82,2921.82) 2404.82,2882 ; P1.2@2376.66,2893.66 ccw(c2404.82,2921.82) 2404.82,2882 ; P1.2@2383.74,2863.26 cw(c2428.97,2818.03) 2428.97,2882 ; P1.2@2383.74,2863.26 cw(c2428.97,2818.03) 2428.97,2882 ; P1.2@2383.74,2863.26 cw(c2428.97,2818.03) 2428.97,2882 ; P1.2@2383.74,2863.26 cw(c2428.97,2818.03) 2428.97,2882 ; P1.2@2383.74,2863.26 cw(c2428.97,2818.03) 2428.97,2882 ; P1.2@2383.74,2900.74 ccw(c2428.97,2945.97) 2428.97,2882 ; P1.2@2383.74,2900.74 ccw(c2428.97,2945.97) 2428.97,2882 ; P1.2@2383.74,2900.74 ccw(c2428.97,2945.97) 2428.97,2882 ; P1.2@2383.74,2900.74 ccw(c2428.97,2945.97) 2428.97,2882 ; P1.2@2383.74,2900.74 ccw(c2428.97,2945.97) 2428.97,2882 ; 3285,3168 3313,3168 3320.89,3160.11 ; 3320.89,3160.11 3340.32,3140.68 ; 3340.32,3140.68 ccw(c3351.89,3140.68) 3348.37,3129.66 cw(c3351.89,3140.68) 3340.32,3140.68 ; v1@3223.69,3192.91 cw(c3223.69,3160.54) 3246.57,3183.43 ccw(c3223.69,3160.54) v1@3223.69,3192.91 ; R38.2@3334.91,3126.39 ccw(c3321.85,3139.45) 3340.32,3139.45 cw(c3321.85,3139.45) R38.2@3334.91,3126.39
  Bottom Layer w15: C15.2@2347.31,3759 2370,3759 ; v1(2415,3700) 2415,3714 ; 3180,3333 3172.34,3340.66 3167,3346 3243,3422 R31.2@3243,3589.68 R30.2@3313,3589.68 ; C15.2@2344.83,3761.4 cw(c2356.06,3746.1) 2369.48,3759.52 ; C15.2@2344.83,3761.4 cw(c2356.06,3746.1) 2369.48,3759.52 ; C15.2@2344.83,3761.4 cw(c2356.06,3746.1) 2369.48,3759.52 ; C15.2@2344.83,3761.4 cw(c2356.06,3746.1) 2369.48,3759.52 ; C15.2@2344.83,3761.4 cw(c2356.06,3746.1) 2369.48,3759.52 ; C15.2@2347.31,3747.21 cw(c2347.31,3663.97) 2406.17,3722.83 ; C15.2@2347.31,3747.21 cw(c2347.31,3663.97) 2406.17,3722.83 ; C15.2@2347.31,3747.21 cw(c2347.31,3663.97) 2406.17,3722.83 ; C15.2@2347.31,3747.21 cw(c2347.31,3663.97) 2406.17,3722.83 ; C15.2@2347.31,3747.21 cw(c2347.31,3663.97) 2406.17,3722.83 ; C15.2@2347.31,3762.21 cw(c2347.31,3715.19) 2380.56,3748.44 ; C15.2@2347.31,3762.21 cw(c2347.31,3715.19) 2380.56,3748.44 ; C15.2@2347.31,3762.21 cw(c2347.31,3715.19) 2380.56,3748.44 ; C15.2@2347.31,3762.21 cw(c2347.31,3715.19) 2380.56,3748.44 ; C15.2@2347.31,3762.21 cw(c2347.31,3715.19) 2380.56,3748.44 ; C15.2@2353.71,3749.31 cw(c2366.53,3731.86) 2381.83,3747.17 ; C15.2@2353.71,3749.31 cw(c2366.53,3731.86) 2381.83,3747.17 ; C15.2@2353.71,3749.31 cw(c2366.53,3731.86) 2381.83,3747.17 ; C15.2@2353.71,3749.31 cw(c2366.53,3731.86) 2381.83,3747.17 ; C15.2@2353.71,3749.31 cw(c2366.53,3731.86) 2381.83,3747.17 ; C15.2@2355.71,3752.19 cw(c2370,3740.59) 2370,3759 ; C15.2@2355.71,3752.19 cw(c2370,3740.59) 2370,3759 ; C15.2@2355.71,3752.19 cw(c2370,3740.59) 2370,3759 ; C15.2@2355.71,3752.19 cw(c2370,3740.59) 2370,3759 ; C15.2@2355.71,3752.19 cw(c2370,3740.59) 2370,3759 ; C15.2@2355.71,3765.81 ccw(c2370,3777.41) 2370,3759 ; C15.2@2355.71,3765.81 ccw(c2370,3777.41) 2370,3759 ; C15.2@2355.71,3765.81 ccw(c2370,3777.41) 2370,3759 ; C15.2@2355.71,3765.81 ccw(c2370,3777.41) 2370,3759 ; C15.2@2355.71,3765.81 ccw(c2370,3777.41) 2370,3759 ; 2370,3759 2415,3714 ; 2394.38,3734.62 cw(c2359.76,3700) v1@2408.72,3700 ; 2394.38,3734.62 cw(c2359.76,3700) v1@2408.72,3700 ; 2394.38,3734.62 cw(c2359.76,3700) v1@2408.72,3700 ; 2394.38,3734.62 cw(c2359.76,3700) v1@2408.72,3700 ; 2394.38,3734.62 cw(c2359.76,3700) v1@2408.72,3700 ; v1@2410.82,3704.69 ccw(c2402.53,3714) 2415,3714 ; v1@2410.82,3704.69 ccw(c2402.53,3714) 2415,3714 ; v1@2410.82,3704.69 ccw(c2402.53,3714) 2415,3714 ; v1@2410.82,3704.69 ccw(c2402.53,3714) 2415,3714 ; 2415,3714 ccw(c2427.47,3714) v1@2419.18,3704.69 ; 2415,3714 ccw(c2427.47,3714) v1@2419.18,3704.69 ; 2415,3714 ccw(c2427.47,3714) v1@2419.18,3704.69 ; 2415,3714 ccw(c2427.47,3714) v1@2419.18,3704.69 ; R31.2@3235.36,3582.04 cw(c3216.91,3563.59) 3243,3563.59 ; R31.2@3235.36,3582.04 cw(c3216.91,3563.59) 3243,3563.59 ; R31.2@3235.36,3582.04 cw(c3216.91,3563.59) 3243,3563.59 ; R31.2@3235.36,3582.04 cw(c3216.91,3563.59) 3243,3563.59 ; R31.2@3235.36,3582.04 cw(c3216.91,3563.59) 3243,3563.59 ; 3243,3563.59 cw(c3269.09,3563.59) R31.2@3250.64,3582.04 ; 3243,3563.59 cw(c3269.09,3563.59) R31.2@3250.64,3582.04 ; 3243,3563.59 cw(c3269.09,3563.59) R31.2@3250.64,3582.04 ; 3243,3563.59 cw(c3269.09,3563.59) R31.2@3250.64,3582.04 ; 3243,3563.59 cw(c3269.09,3563.59) R31.2@3250.64,3582.04 ; R31.2@3251.63,3582.04 cw(c3270.07,3563.59) 3270.07,3589.68 ; R31.2@3251.63,3582.04 cw(c3270.07,3563.59) 3270.07,3589.68 ; R31.2@3251.63,3582.04 cw(c3270.07,3563.59) 3270.07,3589.68 ; R31.2@3251.63,3582.04 cw(c3270.07,3563.59) 3270.07,3589.68 ; R31.2@3251.63,3582.04 cw(c3270.07,3563.59) 3270.07,3589.68 ; R31.2@3251.63,3597.33 ccw(c3270.07,3615.77) 3270.07,3589.68 ; R31.2@3251.63,3597.33 ccw(c3270.07,3615.77) 3270.07,3589.68 ; R31.2@3251.63,3597.33 ccw(c3270.07,3615.77) 3270.07,3589.68 ; R31.2@3251.63,3597.33 ccw(c3270.07,3615.77) 3270.07,3589.68 ; R31.2@3251.63,3597.33 ccw(c3270.07,3615.77) 3270.07,3589.68 ; 3285.93,3589.68 cw(c3285.93,3563.59) R30.2@3304.37,3582.04 ; 3285.93,3589.68 ccw(c3285.93,3615.77) R30.2@3304.37,3597.33 ; 3285.93,3589.68 cw(c3285.93,3563.59) R30.2@3304.37,3582.04 ; 3285.93,3589.68 ccw(c3285.93,3615.77) R30.2@3304.37,3597.33 ; 3285.93,3589.68 ccw(c3285.93,3615.77) R30.2@3304.37,3597.33 ; 3285.93,3589.68 cw(c3285.93,3563.59) R30.2@3304.37,3582.04 ; 3285.93,3589.68 ccw(c3285.93,3615.77) R30.2@3304.37,3597.33 ; 3285.93,3589.68 cw(c3285.93,3563.59) R30.2@3304.37,3582.04 ; 3285.93,3589.68 ccw(c3285.93,3615.77) R30.2@3304.37,3597.33 ; 3285.93,3589.68 cw(c3285.93,3563.59) R30.2@3304.37,3582.04
  Bottom Layer w31.5: v1(2999.69,3372) 3031.02,3340.66 3172.34,3340.66 ; v1@3000.69,3376 v1@3000.69,3434 ; 3180,3333 3224,3289 3224,3264 v1(3223.51,3232.38) 3223.03,3201.7 v1@3223,3200 ; 3209.68,3303.32 cw(c3170.37,3264) 3225.97,3264 ; 3209.68,3303.32 cw(c3170.37,3264) 3225.97,3264 ; 3209.68,3303.32 cw(c3170.37,3264) 3225.97,3264 ; 3031.03,3340.66 ccw(c3031.03,3407.74) 3095.35,3388.7 cw(c3031.03,3407.74) 3031.03,3340.66 ; 3073.2,3340.66 ccw(c3073.2,3395.26) 3125.55,3379.77 cw(c3073.2,3395.26) 3073.2,3340.66 ; 3115.37,3340.66 ccw(c3115.37,3382.78) 3155.75,3370.83 cw(c3115.37,3382.78) 3115.37,3340.66
  other v1: 2999.69,3438
+5V: +5v_L.1 C24.2 C26.1 LeiDa.1 U5.3 | length 1712.4
  Top Layer w20: LeiDa.1@3595.82,3929.98 LeiDa.1@3595.82,3925.98 3595.82,3874.18 3612.31,3857.69 ; 3606,3615.42 C26.1@3606,3717 ; C24.2@3618,3796 C24.2@3612.31,3796 ; C26.1@3621.94,3716.1 3606.04,3732 3606.04,3796 C24.2@3612.31,3796 ; 3606,3627.03 ccw(c3633.2,3627.03) 3613.97,3607.8 ; 3606,3627.03 ccw(c3633.2,3627.03) 3613.97,3607.8 ; 3606,3627.03 ccw(c3633.2,3627.03) 3613.97,3607.8 ; 3606,3649.02 cw(c3684.92,3649.02) C26.1@3629.12,3704.82 ; 3606,3649.02 cw(c3684.92,3649.02) C26.1@3629.12,3704.82 ; 3606,3649.02 cw(c3684.92,3649.02) C26.1@3629.12,3704.82 ; 3606,3649.02 cw(c3684.92,3649.02) C26.1@3629.12,3704.82 ; 3606,3649.02 cw(c3684.92,3649.02) C26.1@3629.12,3704.82 ; 3606.04,3759.81 cw(c3647.52,3759.81) C24.2@3618.19,3789.14 ; 3606.04,3759.81 cw(c3647.52,3759.81) C24.2@3618.19,3789.14 ; 3606.04,3759.81 cw(c3647.52,3759.81) C24.2@3618.19,3789.14 ; 3606.04,3759.81 cw(c3647.52,3759.81) C24.2@3618.19,3789.14 ; 3606.04,3759.81 cw(c3647.52,3759.81) C24.2@3618.19,3789.14 ; C24.2@3606.04,3790.89 ccw(c3684.82,3790.89) C26.1@3629.12,3735.18 ; C24.2@3606.04,3790.89 ccw(c3684.82,3790.89) C26.1@3629.12,3735.18 ; C24.2@3606.04,3790.89 ccw(c3684.82,3790.89) C26.1@3629.12,3735.18 ; C24.2@3606.04,3790.89 ccw(c3684.82,3790.89) C26.1@3629.12,3735.18 ; C24.2@3606.04,3790.89 ccw(c3684.82,3790.89) C26.1@3629.12,3735.18 ; C24.2@3606.44,3802.86 ccw(c3592.26,3817.04) 3612.31,3817.04 ; C24.2@3606.44,3802.86 ccw(c3592.26,3817.04) 3612.31,3817.04 ; C24.2@3606.44,3802.86 ccw(c3592.26,3817.04) 3612.31,3817.04 ; C24.2@3606.44,3802.86 ccw(c3592.26,3817.04) 3612.31,3817.04 ; C24.2@3606.44,3802.86 ccw(c3592.26,3817.04) 3612.31,3817.04 ; C24.2@3612.31,3796 3612.31,3857.69 ; 3612.31,3817.04 ccw(c3632.37,3817.04) C24.2@3618.19,3802.86 ; 3612.31,3817.04 ccw(c3632.37,3817.04) C24.2@3618.19,3802.86 ; 3612.31,3817.04 ccw(c3632.37,3817.04) C24.2@3618.19,3802.86 ; 3612.31,3817.04 ccw(c3632.37,3817.04) C24.2@3618.19,3802.86 ; 3612.31,3817.04 ccw(c3632.37,3817.04) C24.2@3618.19,3802.86 ; 3612.31,3857.69 ccw(c3628.44,3857.69) 3617.55,3845.79 cw(c3628.44,3857.69) 3612.31,3857.69 ; 3600.06,3869.94 cw(c3573.13,3843) 3611.22,3843 ccw(c3573.13,3843) 3600.06,3869.94 ; 3606,3663.24 ccw(c3684.41,3663.24) 3628.97,3607.8 cw(c3684.41,3663.24) 3606,3663.24 ; 3606.31,3863.69 cw(c3592.22,3849.59) 3611.37,3844.05 ccw(c3592.22,3849.59) 3606.31,3863.69 ; 3612.31,3827.39 cw(c3630.61,3827.39) 3617.67,3840.33 ccw(c3630.61,3827.39) 3612.31,3827.39
  Bottom Layer w20: v1(3615,3843) 3615,3815 3626,3804 3626,3775 +5v_L.1@3636,3765
AD_BAT: C9.2 R16.1 U3.14 VBAT.1 | length 2123.1
  Top Layer w8: U3.14@2956.55,3160.29 3017.71,3160.29 3048,3130 3048,2661 3062,2647 v1(3079,2647) ; v1@3080,2647 3129.69,2647 C9.2@3129.69,2650 3129.69,2670.69 ; 3168.69,2693.69 ccw(c3141.36,2721.02) R16.1@3180.01,2721.02 ; 3172.8,2697.8 cw(c3194.31,2676.28) R16.1@3194.31,2706.71 ; R16.1@3194.31,2722 3194.31,2719.31 3160,2685 3144,2685 ; 3095.15,2647 cw(c3095.15,2612.46) 3119.57,2636.88 ccw(c3095.15,2612.46) 3095.15,2647 ; 3095.15,2647 ccw(c3095.15,2681.54) 3119.57,2657.12 cw(c3095.15,2681.54) 3095.15,2647 ; C9.2@3123.51,2660.89 ccw(c3118.83,2670.69) 3129.69,2670.69 ; C9.2@3123.51,2660.89 ccw(c3118.83,2670.69) 3129.69,2670.69 ; C9.2@3123.51,2660.89 ccw(c3118.83,2670.69) 3129.69,2670.69 ; 3129.69,2670.69 ccw(c3140.54,2670.69) C9.2@3135.86,2660.89 ; 3129.69,2670.69 ccw(c3140.54,2670.69) C9.2@3135.86,2660.89 ; 3129.69,2670.69 ccw(c3140.54,2670.69) C9.2@3135.86,2660.89 ; 3129.69,2670.69 ccw(c3137.51,2670.69) 3134.74,2663.37 cw(c3137.51,2670.69) 3129.69,2670.69 ; 3129.69,2670.69 cw(c3121.86,2670.69) 3124.63,2663.37 ccw(c3121.86,2670.69) 3129.69,2670.69 ; 3129.69,2670.69 3144,2685 ; 3144,2685 ccw(c3158.98,2670.02) 3141.49,2658.06 cw(c3158.98,2670.02) 3144,2685 ; v1@3092.69,2647 ccw(c3092.69,2685.01) 3119.57,2658.13 cw(c3092.69,2685.01) v1@3092.69,2647 ; 3097.6,2647 cw(c3097.6,2615.93) 3119.57,2637.9 ccw(c3097.6,2615.93) 3097.6,2647 ; C9.2@3128.29,2649.03 cw(c3142.79,2658.95) 3130.37,2671.37 ccw(c3142.79,2658.95) C9.2@3128.29,2649.03 ; C9.2@3134.89,2653.55 cw(c3150.88,2664.48) 3137.18,2678.18 ccw(c3150.88,2664.48) C9.2@3134.89,2653.55 ; 3162.85,2687.85 ccw(c3131.06,2719.65) 3176.01,2720.69 cw(c3131.06,2719.65) 3162.85,2687.85 ; 3163.85,2688.85 ccw(c3134.09,2718.61) 3176.05,2721.9 cw(c3134.09,2718.61) 3163.85,2688.85 ; 3175.62,2700.62 cw(c3190.31,2685.93) 3190.31,2706.71 ccw(c3190.31,2685.93) 3175.62,2700.62 ; 3176.08,2701.08 ccw(c3156.91,2720.24) 3184.01,2720.87 cw(c3156.91,2720.24) 3176.08,2701.08 ; 3176.13,2701.13 ccw(c3156.86,2720.4) 3184.03,2722.52 cw(c3156.86,2720.4) 3176.13,2701.13 ; 3179.04,2704.04 cw(c3190.31,2692.76) 3190.31,2708.71 ccw(c3190.31,2692.76) 3179.04,2704.04
  Bottom Layer w8: VBAT.1@3040,2585 3040,2609 v1@3076,2645 ; v1@3076,2645 ccw(c3100.62,2620.38) 3070.55,2602.83 cw(c3100.62,2620.38) v1@3076,2645 ; VBAT.1@3040,2620.37 ccw(c3040,2647.82) 3059.41,2628.41 cw(c3040,2647.82) VBAT.1@3040,2620.37 ; VBAT.1@3049.82,2590.73 cw(c3072.82,2604.16) 3053.99,2622.99 ccw(c3072.82,2604.16) VBAT.1@3049.82,2590.73 ; VBAT.1@3056.73,2594.76 cw(c3082.09,2609.56) 3061.33,2630.33 ccw(c3082.09,2609.56) VBAT.1@3056.73,2594.76 ; 3060.6,2629.6 cw(c3079,2611.2) 3079,2637.22 ccw(c3079,2611.2) 3060.6,2629.6 ; 3063.01,2632.01 ccw(c3048.02,2647) 3069.22,2647 cw(c3048.02,2647) 3063.01,2632.01 ; VBAT.1@3063.64,2598.8 cw(c3091.35,2614.97) 3068.66,2637.66 ccw(c3091.35,2614.97) VBAT.1@3063.64,2598.8
AD_NTC: R15.1 U3.30 V_NTC.1 | length 2454.5
  Top Layer w8: v1(2435,3395) 2435,3379.46 ; U3.30@2787.28,3282.31 2787.28,3285.72 2758,3315 2499.46,3315 2435,3379.46 ; v1@2428.78,3395 ccw(c2451.29,3395) 2435.37,3379.08 ; v1@2428.78,3395 ccw(c2451.29,3395) 2435.37,3379.08 ; v1@2428.78,3395 ccw(c2451.29,3395) 2435.37,3379.08 ; v1@2428.78,3395 ccw(c2451.29,3395) 2435.37,3379.08 ; v1@2428.78,3395 ccw(c2451.29,3395) 2435.37,3379.08 ; v1@2430.77,3386.18 cw(c2427.54,3379.46) 2435,3379.46 ; v1@2430.77,3386.18 cw(c2427.54,3379.46) 2435,3379.46 ; v1@2430.77,3386.18 cw(c2427.54,3379.46) 2435,3379.46 ; v1@2430.77,3386.18 cw(c2427.54,3379.46) 2435,3379.46 ; v1@2430.77,3386.18 cw(c2427.54,3379.46) 2435,3379.46 ; v1@2430.77,3386.18 cw(c2427.54,3379.46) 2435,3379.46 ; v1@2430.77,3386.18 cw(c2427.54,3379.46) 2435,3379.46 ; v1@2430.77,3386.18 cw(c2427.54,3379.46) 2435,3379.46 ; 2435,3379.46 cw(c2442.46,3379.46) v1@2439.23,3386.18 ; 2435,3379.46 cw(c2442.46,3379.46) v1@2439.23,3386.18 ; 2435,3379.46 cw(c2442.46,3379.46) v1@2439.23,3386.18 ; 2435,3379.46 cw(c2442.46,3379.46) v1@2439.23,3386.18 ; 2435,3379.46 cw(c2442.46,3379.46) v1@2439.23,3386.18 ; 2435,3379.46 cw(c2442.46,3379.46) v1@2439.23,3386.18 ; 2435,3379.46 cw(c2442.46,3379.46) v1@2439.23,3386.18 ; 2435,3379.46 cw(c2442.46,3379.46) v1@2439.23,3386.18 ; v1@2436.78,3395 ccw(c2478.6,3395) 2449.03,3365.43 ; v1@2436.78,3395 ccw(c2478.6,3395) 2449.03,3365.43 ; v1@2436.78,3395 ccw(c2478.6,3395) 2449.03,3365.43 ; v1@2436.78,3395 ccw(c2478.6,3395) 2449.03,3365.43 ; v1@2436.78,3395 ccw(c2478.6,3395) 2449.03,3365.43 ; v1@2444.78,3395 ccw(c2505.92,3395) 2462.69,3351.77 ; v1@2444.78,3395 ccw(c2505.92,3395) 2462.69,3351.77 ; v1@2444.78,3395 ccw(c2505.92,3395) 2462.69,3351.77 ; v1@2444.78,3395 ccw(c2505.92,3395) 2462.69,3351.77 ; v1@2444.78,3395 ccw(c2505.92,3395) 2462.69,3351.77 ; 2773.04,3299.96 ccw(c2787.28,3314.19) U3.30@2787.28,3294.06 ; 2773.04,3299.96 ccw(c2787.28,3314.19) U3.30@2787.28,3294.06 ; 2773.04,3299.96 ccw(c2787.28,3314.19) U3.30@2787.28,3294.06 ; U3.30@2786.7,3286.3 ccw(c2787.28,3286.88) U3.30@2787.28,3286.06 ; U3.30@2786.7,3286.3 ccw(c2787.28,3286.88) U3.30@2787.28,3286.06 ; U3.30@2786.7,3286.3 ccw(c2787.28,3286.88) U3.30@2787.28,3286.06
  Bottom Layer w8: R15.1@2352.31,3902 2374,3902 2392,3884 2392,3800.21 2469,3723.21 2469,3676 2546.37,3598.63 2546.37,3590 ; v1(2435,3395) 2459,3395 2546.37,3482.37 2546.37,3590 ; 2557.73,3590 ccw(c2557.73,3605.4) V_NTC.1@2572.23,3600.21 ; 2558.39,3590 cw(c2558.39,3574.43) V_NTC.1@2572.75,3580.44 ; V_NTC.1@2564.69,3602.91 cw(c2546.37,3609.46) 2546.37,3590 ; V_NTC.1@2565.37,3577.35 ccw(c2546.37,3569.41) 2546.37,3590 ; V_NTC.1@2598,3591 2597,3590 2546.37,3590 ; R15.1@2350.33,3910.5 cw(c2355.18,3887.3) 2371.94,3904.06 ; R15.1@2350.33,3910.5 cw(c2355.18,3887.3) 2371.94,3904.06 ; R15.1@2350.33,3910.5 cw(c2355.18,3887.3) 2371.94,3904.06 ; R15.1@2350.33,3910.5 cw(c2355.18,3887.3) 2371.94,3904.06 ; R15.1@2350.33,3910.5 cw(c2355.18,3887.3) 2371.94,3904.06 ; R15.1@2351.97,3902.67 cw(c2358.79,3869.98) 2382.4,3893.6 ; R15.1@2351.97,3902.67 cw(c2358.79,3869.98) 2382.4,3893.6 ; R15.1@2351.97,3902.67 cw(c2358.79,3869.98) 2382.4,3893.6 ; R15.1@2351.97,3902.67 cw(c2358.79,3869.98) 2382.4,3893.6 ; R15.1@2351.97,3902.67 cw(c2358.79,3869.98) 2382.4,3893.6 ; R15.1@2353.6,3894.84 cw(c2362.4,3852.67) 2392.87,3883.13 ; R15.1@2353.6,3894.84 cw(c2362.4,3852.67) 2392.87,3883.13 ; R15.1@2353.6,3894.84 cw(c2362.4,3852.67) 2392.87,3883.13 ; R15.1@2353.6,3894.84 cw(c2362.4,3852.67) 2392.87,3883.13 ; R15.1@2353.6,3894.84 cw(c2362.4,3852.67) 2392.87,3883.13 ; 2458.61,3395 ccw(c2458.61,3371.39) 2441.92,3388.08 cw(c2458.61,3371.39) 2458.61,3395 ; 2458.61,3395 cw(c2458.61,3418.61) 2441.92,3401.92 ccw(c2458.61,3418.61) 2458.61,3395
BAT+: B+.1 BAT.3 C5.1 Q1.2 Q6.3 R6.1 U1.5 | length 4646.9
  Top Layer w39.37: R6.1@3338.31,2718 3338.31,2771.12 Q1.2@3349.88,2782.69 ; Q1.2@3338.31,2764.52 cw(c3358.8,2764.52) Q1.2@3344.31,2779.01 ; BAT.3@3817.05,3734.81 3825,3726.86 BAT.3@3825,3701 ; U1.5@3856,3569 3865.32,3578.32 C5.1@3928,3578.32 C5.1@3928,3581.32 ; 3896.32,3581.32 C5.1@3928,3581.32 ; 3928,3598 C5.1@3928,3581.32 ; C5.1@3933.68,3581.32 C5.1@3928,3581.32 ; 4019,3586 Q6.3@4026.62,3593.62 ; v1@3329.18,2747.82 ccw(c3307.11,2769.89) Q1.2@3338.31,2769.89 ; v1@3329.18,2747.82 ccw(c3307.11,2769.89) Q1.2@3338.31,2769.89 ; v1@3329.18,2747.82 ccw(c3307.11,2769.89) Q1.2@3338.31,2769.89 ; v1@3329.18,2747.82 ccw(c3307.11,2769.89) Q1.2@3338.31,2769.89 ; v1@3329.18,2747.82 ccw(c3307.11,2769.89) Q1.2@3338.31,2769.89 ; v1@3329.18,2756.18 cw(c3307.11,2734.11) R6.1@3338.31,2734.11 ; v1@3329.18,2756.18 cw(c3307.11,2734.11) R6.1@3338.31,2734.11 ; v1@3329.18,2756.18 cw(c3307.11,2734.11) R6.1@3338.31,2734.11 ; v1@3329.18,2756.18 cw(c3307.11,2734.11) R6.1@3338.31,2734.11 ; v1@3329.18,2756.18 cw(c3307.11,2734.11) R6.1@3338.31,2734.11 ; BAT.3@3811.3,3726.82 cw(c3792.05,3700.08) BAT.3@3825,3700.08 ; BAT.3@3811.3,3726.82 cw(c3792.05,3700.08) BAT.3@3825,3700.08 ; BAT.3@3811.3,3726.82 cw(c3792.05,3700.08) BAT.3@3825,3700.08 ; 3914.75,3611.25 cw(c3881.82,3578.32) C5.1@3928.39,3578.32 ; 3914.75,3611.25 cw(c3881.82,3578.32) C5.1@3928.39,3578.32 ; 3914.75,3611.25 cw(c3881.82,3578.32) C5.1@3928.39,3578.32 ; BAT.3@3826.89,3734.81 ccw(c3913.07,3734.81) 3852.13,3673.87 cw(c3913.07,3734.81) BAT.3@3826.89,3734.81
  Top Layer w47.24: BAT.3@3825,3701 3928,3598 ; C5.1@3921.14,3586 4019,3586 ; BAT.3@3824.92,3723 ccw(c3877.85,3723) 3840.43,3685.57 cw(c3877.85,3723) BAT.3@3824.92,3723 ; 3921.47,3604.53 cw(c3895.26,3578.32) 3932.33,3578.32 ccw(c3895.26,3578.32) 3921.47,3604.53
  Bottom Layer w10: v1(3325,2752) 3325,2776 3487,2938 3487,3031.76 3486.25,3032.51 3486.25,3062.25 3487,3063 ; 3503,3076 3500,3076 3487,3063 ; BAT.3@3817.05,3710.28 cw(c3817.05,3678.04) 3839.84,3700.84 ; BAT.3@3817.05,3734.81 3820,3731.86 BAT.3@3820,3720.69 ; BAT.3@3821.57,3734.81 ccw(c3859.47,3734.81) BAT.3@3832.67,3708.01 ; v1@3318.79,2758.21 ccw(c3303.8,2773.2) 3325,2773.2 ; v1@3318.79,2758.21 ccw(c3303.8,2773.2) 3325,2773.2 ; v1@3318.79,2758.21 ccw(c3303.8,2773.2) 3325,2773.2 ; 3325,2773.2 ccw(c3346.2,2773.2) v1@3331.21,2758.21 ; 3325,2773.2 ccw(c3346.2,2773.2) v1@3331.21,2758.21 ; 3325,2773.2 ccw(c3346.2,2773.2) v1@3331.21,2758.21 ; 3487,3063 3487,3066 3515,3094 3694.33,3094 3886.25,3285.93 3886.25,3410.49 3912.69,3436.93 3912.69,3610.31 ; 3912.69,3610.31 ccw(c3974.99,3610.31) 3965.64,3548.71 cw(c3974.99,3610.31) 3912.69,3610.31 ; 3912.69,3528.88 ccw(c3962.63,3528.88) 3955.13,3479.5 cw(c3962.63,3528.88) 3912.69,3528.88 ; 3912.69,3540.51 ccw(c3964.39,3540.51) 3956.63,3489.39 cw(c3964.39,3540.51) 3912.69,3540.51 ; 3912.69,3552.15 ccw(c3966.16,3552.15) 3958.13,3499.28 cw(c3966.16,3552.15) 3912.69,3552.15 ; 3912.69,3563.78 ccw(c3967.93,3563.78) 3959.63,3509.16 cw(c3967.93,3563.78) 3912.69,3563.78 ; 3912.69,3575.41 ccw(c3969.69,3575.41) 3961.13,3519.05 cw(c3969.69,3575.41) 3912.69,3575.41 ; 3912.69,3587.05 ccw(c3971.46,3587.05) 3962.63,3528.94 cw(c3971.46,3587.05) 3912.69,3587.05 ; 3912.69,3598.68 ccw(c3973.22,3598.68) 3964.14,3538.82 cw(c3973.22,3598.68) 3912.69,3598.68
  Bottom Layer w15: v1@3320.56,2756.44 ccw(c3309.84,2767.16) 3325,2767.16 ccw(c3340.16,2767.16) v1@3329.44,2756.44
  Bottom Layer w25: BAT.3@3817.05,3734.81 3817.05,3705.95 3912.69,3610.31 3923,3600 ; B+.1@3923,3501 3923,3600 ; 3923,3600 ccw(c3984.7,3600) 3968.59,3540.44 cw(c3984.7,3600) 3923,3600 ; BAT.3@3836.05,3723 ccw(c3923.06,3723) 3861.53,3661.47 cw(c3923.06,3723) BAT.3@3836.05,3723 ; 3923,3567.34 ccw(c3975.86,3567.34) 3962.06,3516.31 cw(c3975.86,3567.34) 3923,3567.34
CC1: R4.1 USB1.A5 | length 1447.9
  Top Layer w10: R4.1@3634,2733.31 3664.31,2733.31 ; v1(3678,2747) 3664.31,2733.31 ; USB1.A5@4014.26,2912.89 4014.26,2905.74 v1(4056,2864) ; R4.1@3645,2724.55 cw(c3664.31,2707.65) 3664.31,2733.31 ; R4.1@3645,2724.55 cw(c3664.31,2707.65) 3664.31,2733.31 ; R4.1@3645,2724.55 cw(c3664.31,2707.65) 3664.31,2733.31 ; R4.1@3645,2724.55 cw(c3664.31,2707.65) 3664.31,2733.31 ; R4.1@3645,2724.55 cw(c3664.31,2707.65) 3664.31,2733.31 ; R4.1@3645,2742.08 ccw(c3664.31,2758.98) 3664.31,2733.31 ; R4.1@3645,2742.08 ccw(c3664.31,2758.98) 3664.31,2733.31 ; R4.1@3645,2742.08 ccw(c3664.31,2758.98) 3664.31,2733.31 ; R4.1@3645,2742.08 ccw(c3664.31,2758.98) 3664.31,2733.31 ; R4.1@3645,2742.08 ccw(c3664.31,2758.98) 3664.31,2733.31 ; USB1.A5@4026.59,2908.17 ccw(c4062.24,2908.17) 4037.03,2882.97 ; USB1.A5@4026.59,2908.17 ccw(c4062.24,2908.17) 4037.03,2882.97 ; USB1.A5@4026.59,2908.17 ccw(c4062.24,2908.17) 4037.03,2882.97 ; USB1.A5@4026.59,2908.17 ccw(c4062.24,2908.17) 4037.03,2882.97 ; USB1.A5@4026.59,2908.17 ccw(c4062.24,2908.17) 4037.03,2882.97 ; 4041.01,2878.99 cw(c4026.02,2864) v1@4047.22,2864 ; 4041.01,2878.99 ccw(c4056,2893.98) v1@4056,2872.78 ; 4041.01,2878.99 cw(c4026.02,2864) v1@4047.22,2864 ; 4041.01,2878.99 ccw(c4056,2893.98) v1@4056,2872.78 ; 4041.01,2878.99 ccw(c4056,2893.98) v1@4056,2872.78 ; 4041.01,2878.99 cw(c4026.02,2864) v1@4047.22,2864 ; 4041.01,2878.99 ccw(c4056,2893.98) v1@4056,2872.78 ; 4041.01,2878.99 cw(c4026.02,2864) v1@4047.22,2864 ; 4041.01,2878.99 ccw(c4056,2893.98) v1@4056,2872.78 ; 4041.01,2878.99 cw(c4026.02,2864) v1@4047.22,2864
  Bottom Layer w10: v1(3678,2747) 3721,2747 3895,2921 4000,2921 v1@4056.5,2864.5 ; v1@3684.21,2740.79 cw(c3699.2,2725.8) 3699.2,2747 ; v1@3684.21,2740.79 cw(c3699.2,2725.8) 3699.2,2747 ; v1@3684.21,2740.79 cw(c3699.2,2725.8) 3699.2,2747 ; v1@3684.21,2740.79 cw(c3699.2,2725.8) 3699.2,2747 ; v1@3684.21,2740.79 cw(c3699.2,2725.8) 3699.2,2747 ; v1@3684.21,2753.21 ccw(c3699.2,2768.2) 3699.2,2747 ; v1@3684.21,2753.21 ccw(c3699.2,2768.2) 3699.2,2747 ; v1@3684.21,2753.21 ccw(c3699.2,2768.2) 3699.2,2747 ; v1@3684.21,2753.21 ccw(c3699.2,2768.2) 3699.2,2747 ; v1@3684.21,2753.21 ccw(c3699.2,2768.2) 3699.2,2747 ; 4040.31,2880.69 cw(c4023.61,2864) v1@4047.22,2864 ; 4040.31,2880.69 cw(c4023.61,2864) v1@4047.22,2864 ; 4040.31,2880.69 cw(c4023.61,2864) v1@4047.22,2864 ; 4040.31,2880.69 cw(c4023.61,2864) v1@4047.22,2864 ; 4040.31,2880.69 cw(c4023.61,2864) v1@4047.22,2864 ; 4042.72,2878.28 ccw(c4056,2891.56) v1@4056,2872.78 ; 4042.72,2878.28 ccw(c4056,2891.56) v1@4056,2872.78 ; 4042.72,2878.28 ccw(c4056,2891.56) v1@4056,2872.78 ; 4042.72,2878.28 ccw(c4056,2891.56) v1@4056,2872.78 ; 4042.72,2878.28 ccw(c4056,2891.56) v1@4056,2872.78